# EAGLE board teensyBoard_1.0.2 (EAGLE 6.6.0)
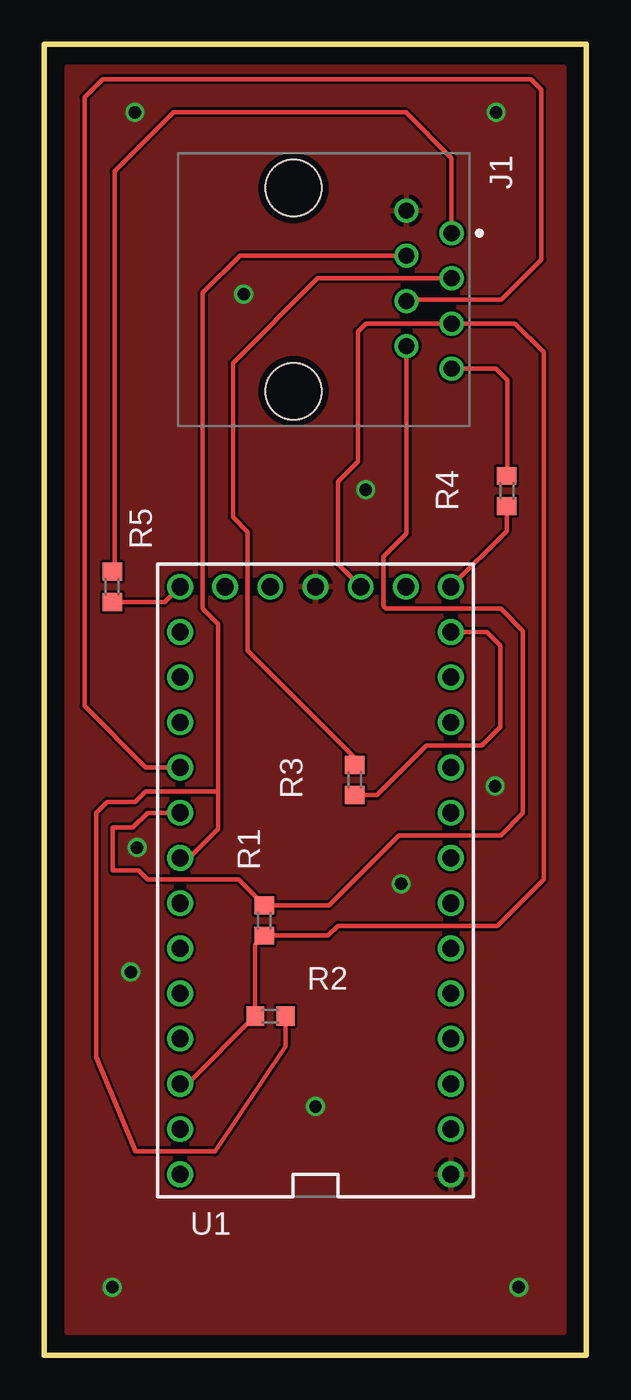
[diagram p0: board, top side]
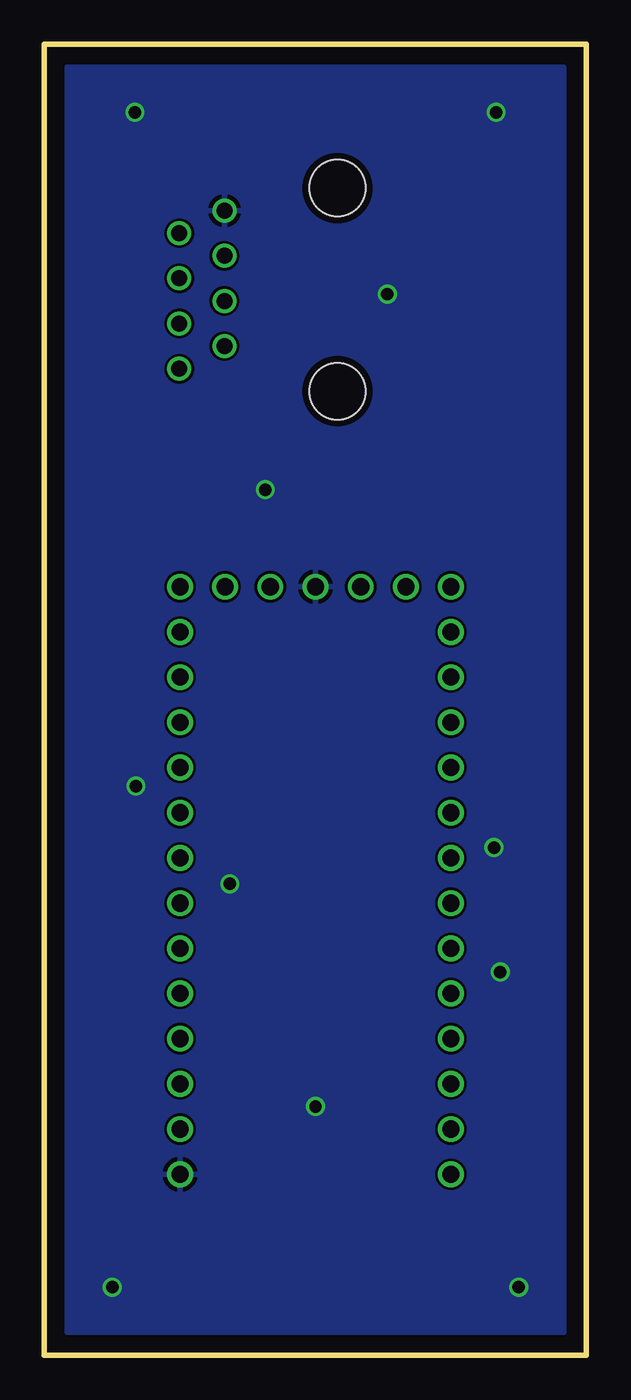
[diagram p1: board, bottom side, seen from below]

Size 30.48 x 73.66 mm. Coordinates in mm from the lower left corner, seen from the top.
Outline: 0,0 0,73.66 30.48,73.66 30.48,0 0,0
Copper layers (1*16): Top 0.0356mm / dielectric 1.5011mm / Bottom 0.0356mm
Design rules "LaenPCBOrder": minimum track width 6mil, minimum drill 13mil, track to track 6mil, track to pad 6mil, pad to pad 6mil, via to via 6mil, smd to smd 6mil, copper to edge 15mil, drill to drill 6mil, minimum pad ring 7mil, minimum via ring 7mil, stop-mask expansion 3mil, vias tented up to drill 0mil, thermal gap 10mil

## Footprints (pad centres in the part's own frame; a part is rotated, then mirrored left to right if it is on the bottom)
MJACK8P8C = drill 0.9: 1 -3.175,5.649; 2 -0.635,5.649; 3 1.905,5.649; 4 4.445,5.649; 5 -4.445,3.109; 6 -1.905,3.109; 7 0.635,3.109; 8 3.175,3.109 | hole 3.17: -5.715,-3.241; 5.715,-3.241
R0603 = smd 1 x 1.1: 1 -0.85,0; 2 0.85,0
TEENSY_3.1_BASIC = drill 0.965: 0 -7.62,13.97; 1 -7.62,11.43; 2 -7.62,8.89; 3 -7.62,6.35; 3.3V 7.62,11.43; 3.3V1 -2.54,-16.51; 4 -7.62,3.81; 5 -7.62,1.27; 6 -7.62,-1.27; 7 -7.62,-3.81; 8 -7.62,-6.35; 9 -7.62,-8.89; 10 -7.62,-11.43; 11 -7.62,-13.97; 12 -7.62,-16.51; 13 7.62,-16.51; 14/A0 7.62,-13.97; 15/A1 7.62,-11.43; 16/A2 7.62,-8.89; 17/A3 7.62,-6.35; 18/A4 7.62,-3.81; 19/A5 7.62,-1.27; 20/A6 7.62,1.27; 21/A7 7.62,3.81; 22/A8 7.62,6.35; 23/A9 7.62,8.89; A14 5.08,-16.51; AGND 7.62,13.97; GND -7.62,16.51; GND1 0,-16.51; PGM 2.54,-16.51; VBAT -5.08,-16.51; VIN 7.62,16.51

## Placement (x,y rotation side)
J1  MJACK8P8CVERT  [MJACK8P8C]  17.25,59.88 270 top
R1  4k7  [R0603]  12.37,24.42 90 top
R2  4k7  [R0603]  12.7,19.05 0 top
R3  50  [R0603]  17.44,32.32 270 top
R4  50  [R0603]  26,48.56 270 top
R5  50  [R0603]  3.81,43.18 270 top
U1  TEENSY_3.1_BASIC  [TEENSY_3.1_BASIC]  15.24,26.67 180 top

## Library data of the parts
J1 = wavemeter
R1-R5 = resistor
U1 = mcu-accessories

## Nets
AGND: U1.AGND
GND: J1.5 U1.GND U1.GND1
N$2: R3.2 U1.11
N$3: J1.6 R2.2 U1.19/A5
N$4: J1.4 R4.1
N$5: R4.2 U1.12
N$6: J1.1 R5.1
N$7: R5.2 U1.13
N$8: J1.8 R1.2 U1.18/A4
N$9: J1.7 U1.17/A3
N$10: J1.2 R3.1
VBAT: U1.VBAT
VDD: J1.3 R1.1 R2.1 U1.3.3V U1.3.3V1
VIN: U1.VIN

## Tracks (layer width: path | path; a pad name or v marks a point on that pad's centre or on a via)
GND  (via drill 0.7)
  other vias: 15.24,13.97 5.08,69.85 25.4,69.85 3.81,3.81 26.67,3.81 25.34,31.98 18.06,48.64 4.85,21.53 20.05,26.48 11.2,59.63 5.21,28.52
  pour Top: 29.21,1.27 1.27,1.27 1.27,72.39 29.21,72.39
  pour Bottom: 1.27,72.39 29.21,72.39 29.21,1.27 1.27,1.27
N$2
  Top 0.254: R3.2 18.7,31.47 21.49,34.27 24.6,34.27 25.64,35.31 25.64,39.87 24.87,40.64 U1.11
N$3
  Top 0.254: J1.6 10.99,61.78 8.9,59.7 8.9,41.95 9.75,41.1 9.75,31.64 | 9.75,31.64 9.75,29.57 8.13,27.94 U1.19/A5 | R2.2 13.55,17.36 9.59,11.44 5.12,11.44 2.9,16.76 2.9,30.45 3.53,31.09 5.09,31.09 5.69,31.69 9.7,31.69 9.75,31.64
N$4
  Top 0.254: J1.4 25.39,55.44 26.04,54.79 26.04,49.45 R4.1
N$5
  Top 0.254: R4.2 26,46.32 U1.12
N$6
  Top 0.254: J1.1 22.9,67.27 20.32,69.85 7.25,69.85 3.94,66.53 3.94,44.16 R5.1
N$7
  Top 0.254: R5.2 6.77,42.33 U1.13
N$8
  Top 0.254: J1.8 20.36,46.16 19.06,44.87 19.06,42.1 19.21,41.95 25.65,41.95 26.91,40.69 26.91,30.47 25.65,29.21 19.94,29.21 16,25.27 R1.2 10.91,26.73 5.8,26.73 5.31,27.23 3.83,27.23 3.83,29.64 4.95,29.64 5.79,30.48 U1.18/A4
N$9
  Top 0.254: J1.7 20.42,59.31 25.68,59.31 27.94,61.57 27.94,71.12 27.36,71.7 3.26,71.7 2.25,70.69 2.25,36.47 5.7,33.02 U1.17/A3
N$10
  Top 0.254: J1.2 15.37,60.52 10.59,55.74 10.59,47.1 11.43,46.27 11.43,39.6 17.44,33.59 R3.1
VDD
  Top 0.254: U1.3.3V1 16.5,44.46 16.5,49.09 17.63,50.22 17.63,57.53 18.07,57.98 J1.3 26.45,57.98 28.07,56.36 28.07,26.73 25.46,24.13 16.51,24.13 15.95,23.57 R1.1 11.85,23.05 R2.1 8.04,15.24 U1.3.3V